# EAGLE board Airowl_Eagle (EAGLE 6.5.0)
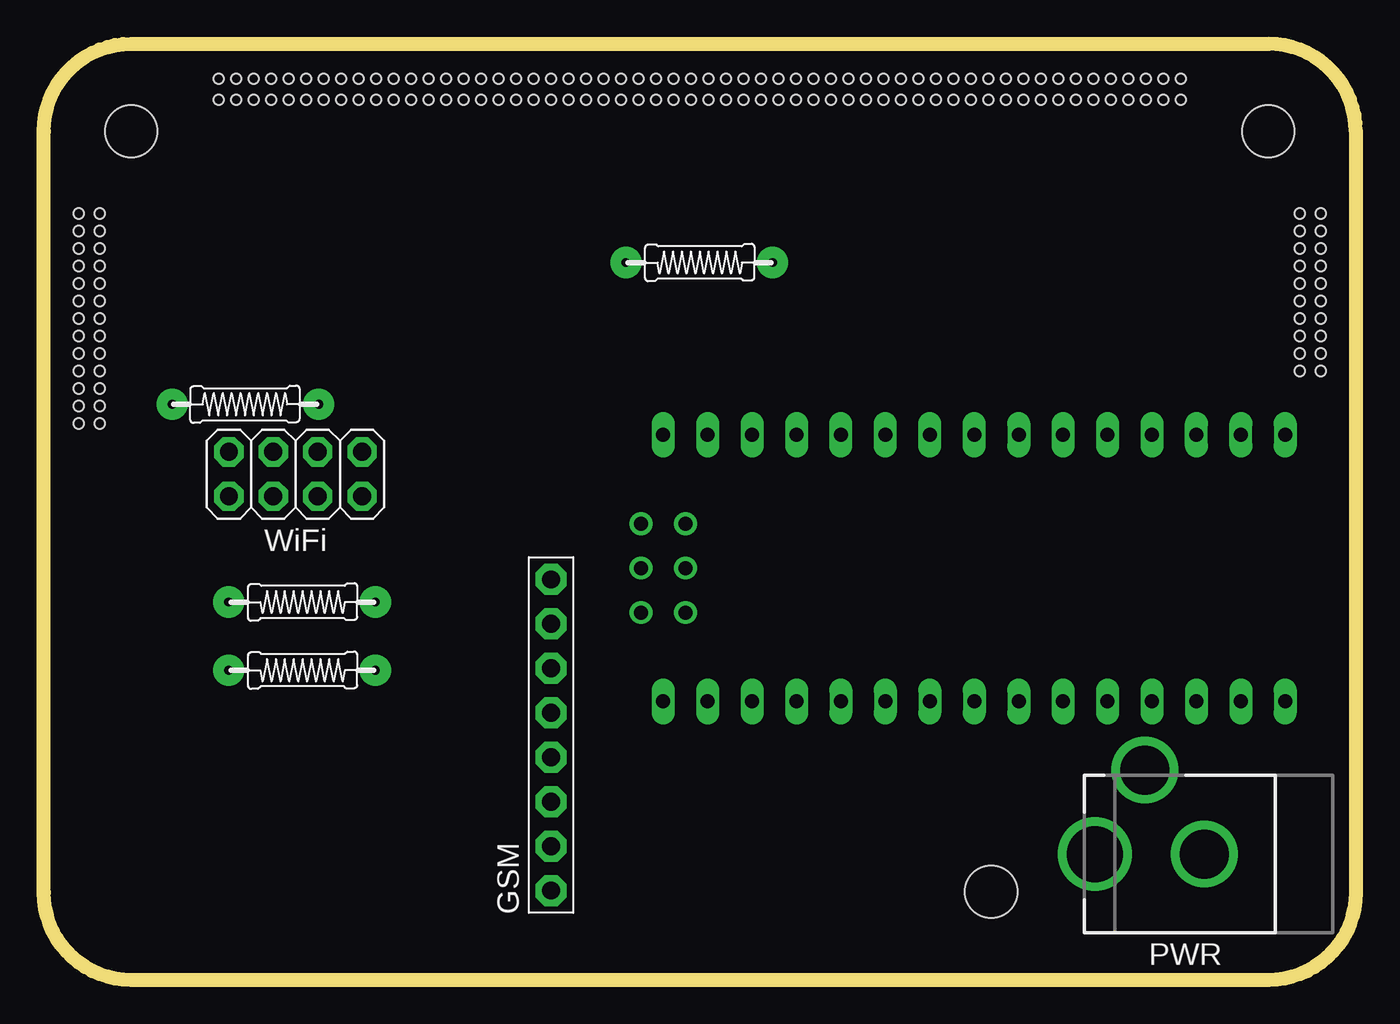
[diagram p0: board, top side]
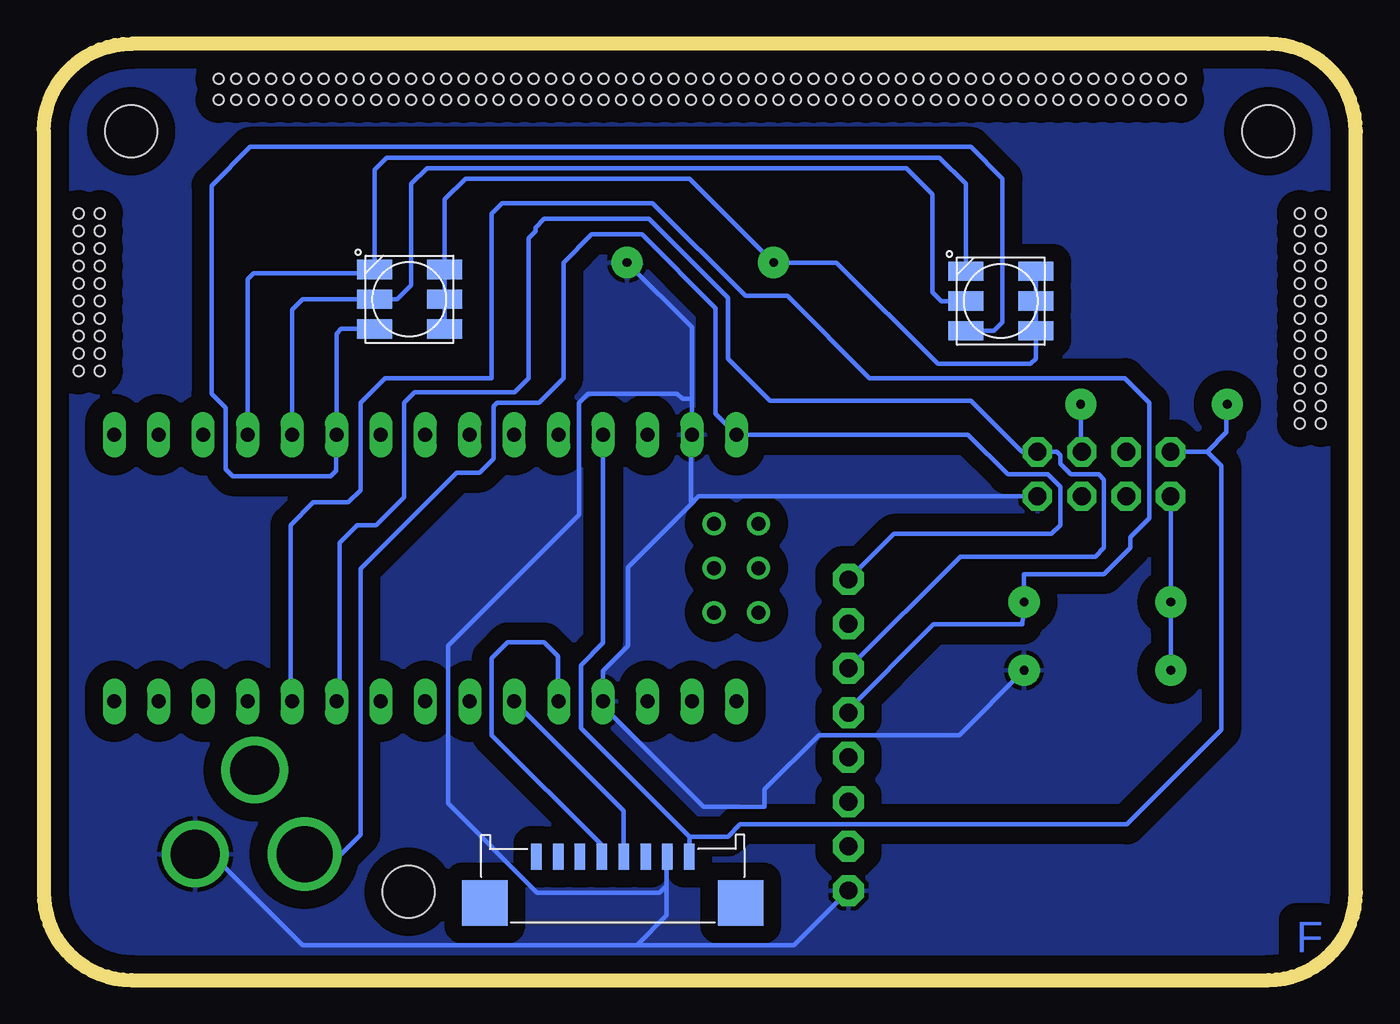
[diagram p1: board, bottom side, seen from below]

Size 75 x 53.5 mm. Coordinates in mm from the lower left corner, seen from the top.
Outline: 0,5 0,48.5 arc-90 5,53.5 70,53.5 arc-90 75,48.5 75,5 arc-90 70,0 5,0 arc-90 0,5
Copper layers (1*16): Top 0.035mm / dielectric 1.5mm / Bottom 0.035mm
Design rules "default": minimum track width 10mil, minimum drill 24mil, track to track 8mil, track to pad 8mil, pad to pad 8mil, via to via 8mil, smd to smd 8mil, copper to edge 40mil, drill to drill 8mil, minimum pad ring 10mil, minimum via ring 8mil, stop-mask expansion 4mil, vias tented up to drill 0mil, thermal gap 10mil
Holes 3 mm at 54.15,5.05 5,48.5 70,48.5
Holes 0.6 mm at 2,43.8 3.2,43.8 2,42.8 3.2,42.8 3.2,41.8 2,41.8 3.2,40.8 2,40.8 3.2,39.8 2,39.8 3.2,38.8 2,38.8 2,37.8 3.2,37.8 3.2,36.8 2,36.8 3.2,35.8 2,35.8 3.2,34.8 2,34.8 2,33.8 3.2,33.8 3.2,32.8 2,32.8 2,31.8 3.2,31.8 10,50.3 10,51.5 11,50.3 11,51.5 12,51.5 12,50.3 13,51.5 13,50.3 14,51.5 14,50.3 15,51.5 15,50.3 16,50.3 16,51.5 17,51.5 17,50.3 18,51.5 18,50.3 19,51.5 19,50.3 20,50.3 20,51.5 21,51.5 21,50.3 22,50.3 22,51.5 23,50.3 23,51.5 24,50.3 24,51.5 25,50.3 25,51.5 26,51.5 26,50.3 27,51.5 27,50.3 28,51.5 28,50.3 29,51.5 29,50.3 30,50.3 30,51.5 31,51.5 31,50.3 32,51.5 32,50.3 33,51.5 33,50.3 34,50.3 34,51.5 35,51.5 35,50.3 36,50.3 36,51.5 37,50.3 37,51.5 38,50.3 38,51.5 39,50.3 39,51.5 40,51.5 40,50.3 41,51.5 41,50.3 42,51.5 42,50.3 43,51.5 43,50.3 44,50.3 44,51.5 45,51.5 45,50.3 46,51.5 46,50.3 47,51.5 47,50.3 48,50.3 48,51.5 49,51.5 49,50.3 50,50.3 50,51.5 51,51.5 51,50.3 52,51.5 52,50.3 53,51.5 53,50.3 54,51.5 54,50.3 55,51.5 55,50.3 56,51.5 56,50.3 57,51.5 57,50.3 58,51.5 58,50.3 59,51.5 59,50.3 60,51.5 60,50.3 61,51.5 61,50.3 62,51.5 62,50.3 63,51.5 63,50.3 64,51.5 64,50.3 65,51.5 65,50.3 71.8,43.8 73,43.8 71.8,42.8 73,42.8 73,41.8 71.8,41.8 73,40.8 71.8,40.8 73,39.8 71.8,39.8 73,38.8 71.8,38.8 71.8,37.8 73,37.8 73,36.8 71.8,36.8 73,35.8 71.8,35.8 73,34.8 71.8,34.8

## Footprints (pad centres in the part's own frame; a part is rotated, then mirrored left to right if it is on the bottom)
NANO = drill 0.8 long: 3.3V -10.16,24.13; 5V -10.16,-1.27; A0 -10.16,19.05; A1 -10.16,16.51; A2 -10.16,13.97; A3 -10.16,11.43; A4 -10.16,8.89; A5 -10.16,6.35; A6 -10.16,3.81; A7 -10.16,1.27; AREF -10.16,21.59; D2 5.08,1.27; D3 5.08,3.81; D4 5.08,6.35; D5 5.08,8.89; D6 5.08,11.43; D7 5.08,13.97; D8 5.08,16.51; D9 5.08,19.05; D10 5.08,21.59; D11 5.08,24.13; D12 5.08,26.67; D13 -10.16,26.67; GND -10.16,-6.35; GND1 5.08,-1.27; RAW -10.16,-8.89; RST -10.16,-3.81; RST1 5.08,-3.81; RX1 5.08,-6.35; TX0 5.08,-8.89 | drill 0.8: ICSP1 -5.08,-10.16; ICSP2 -5.08,-7.62; ICSP3 -2.54,-10.16; ICSP4 -2.54,-7.62; ICSP5 0,-10.16; ICSP6 0,-7.62
WINSEN_CONNECTOR = smd 2.6 x 2.6: P$1 0.2,1.1; P$10 14.85,1.1 | smd 0.6 x 1.5: P$2 3.15,3.75; P$3 4.4,3.75; P$4 5.65,3.75; P$5 6.9,3.75; P$6 8.15,3.75; P$7 9.4,3.75; P$8 10.65,3.75; P$9 11.9,3.75
RGBLED5050 = smd 2 x 1.1: 1 -2,1.7; 2 -2,0; 3 -2,-1.7; 4 2,-1.7; 5 2,0; 6 2,1.7
2X04 = drill 1.016 pad 1.676 octagon: 1 -3.81,-1.27; 2 -3.81,1.27; 3 -1.27,-1.27; 4 -1.27,1.27; 5 1.27,-1.27; 6 1.27,1.27; 7 3.81,-1.27; 8 3.81,1.27
RESISTER(HORIZONTAL) = drill 0.5 pad 1.778: 1 -4.159,0; 2 4.223,0
1X08-BIG = drill 1.016 pad 1.778 octagon: 1 -8.89,0; 2 -6.35,0; 3 -3.81,0; 4 -1.27,0; 5 1.27,0; 6 3.81,0; 7 6.35,0; 8 8.89,0
DCJACK_2MM_PTH = drill 2.8: GND 0,7.35; GNDBREAK 4.8,10.75 | drill 3.2: PWR 0,13.6

## Placement (x,y rotation side)
E$1  [NANO]  44.3,21 270 top
E$2  [WINSEN_CONNECTOR]  50,3.3 0 bottom
E$3  [RGBLED5050]  20.3,38.8 180 bottom
E$4  [2X04]  14.39,28.91 180 top
E$5  [RGBLED5050]  54.1,38.9 180 bottom
E$6  [RESISTER(HORIZONTAL)]  37.5,41 180 top
E$7  [RESISTER(HORIZONTAL)]  11.5,32.9 0 top
E$8  [RESISTER(HORIZONTAL)]  14.8,21.6 180 top
E$9  [RESISTER(HORIZONTAL)]  14.8,17.7 180 top
GSM  [1X08-BIG]  29,14 90 top
PWR  [DCJACK_2MM_PTH]  73.69,7.2 90 top

## Library data of the parts
E$1 = Arduino-clone
E$2 = Wnisen
E$3-E$5 GSM PWR = adafruit
E$6-E$9 = ROBOCON

## Nets
5V: E$1.5V E$2.P$9 E$4.7 E$7.1
GND: E$1.GND E$1.GND1 E$2.P$8 E$4.2 E$6.1 E$9.1 GSM.1 PWR.GND
PWR: E$1.RAW GSM.8 PWR.PWR
S$1: E$3.1 E$3.2 E$3.3 E$5.1 E$5.2 E$5.3 E$6.2
S$3: E$1.A1 E$3.5 E$5.5
S$6: E$1.A0 E$3.4 E$5.4
S$7: E$1.A2 E$3.6 E$5.6
S$8: E$1.D7 E$4.1 GSM.6
S$9: E$1.D8 E$8.1 GSM.5
S$10: E$1.D3 E$2.P$6
S$11: E$1.D2 E$2.P$5
S$12: E$4.3 E$7.2
S$13: E$4.8 E$8.2 E$9.2

## Tracks (layer width: path | path; a pad name or v marks a point on that pad's centre or on a via)
5V
  Bottom 0.254: E$1.5V 43.03,19.27 44.3,18 44.3,14.4 38.1,8.2 | 38.1,8.2 38.1,7.7 38,7.05 E$2.P$9 | 8.5,30.2 8.52,30.18 E$4.7 10.56,30.2 8.5,30.2 | 8.5,30.2 7.4,31.3 7.4,32.84 E$7.1 | 8.5,30.2 7.7,29.4 7.7,14.3 13.1,8.9 35.2,8.9 35.9,8.2 38.1,8.2
GND
  Bottom 0.254: 37.95,33.2 E$1.GND 38,31.11 38,27.2 | 37.95,33.2 37.95,37.29 E$6.1 | 38,27.2 41.6,23.6 41.6,19.1 43.03,17.67 E$1.GND1 43.03,15.63 37.3,9.9 33.79,9.9 33.79,10.91 30.7,14 22.66,14 E$9.1 | E$4.2 37.56,27.64 38,27.2 | 39.4,5.4 39.4,3.7 41.1,2 | 41.1,2 60.2,2 65.4,7.2 PWR.GND | GSM.1 32.11,2 41.1,2 | E$2.P$8 39.4,7 39.4,5.4 | 39.4,5.4 39.8,5 46.8,5 51.9,10.1 51.9,19.1 44.4,26.6 44.4,33 43.9,33.5 38.8,33.5 38.5,33.2 37.95,33.2
  pour Bottom (isolate 1.016): -0.6,-0.6 -0.6,54.1 75.6,54.1 75.6,-0.7 -0.6,-0.7
PWR
  Bottom 0.254: PWR.PWR 58,7.2 56.9,8.3 56.9,23.5 51.4,29 50.1,29 49.3,29.8 49.3,32.8 49.1,33 46.7,33 45.3,34.4 45.3,41 43.7,42.6 40.8,42.6 36.6,38.4 36.6,32.35 E$1.RAW | E$1.RAW 35.41,31.19 35.4,31.2 | E$1.RAW 22.16,31.16 19.9,28.9 17.6,28.9 16.9,28.2 16.9,26 17.4,25.5 26.39,25.5 GSM.8
S$1
  Bottom 0.254: E$3.3 E$3.2 E$3.1 18.3,35.5 18.6,35.2 23.9,35.2 29.7,41 E$6.2 38.08,45.8 50.9,45.8 52.1,44.6 E$5.3 E$5.2 E$5.1
S$3
  Bottom 0.254: E$1.A1 60.81,38.29 60.2,38.9 E$5.5 54.8,38.9 54,39.7 54,45.5 53.1,46.4 25.7,46.4 24.2,44.9 24.2,39.3 23.7,38.8 E$3.5
S$5
  Bottom 0.254: 52.88,39.05 52.9,39.03
S$6
  Bottom 0.254: E$1.A0 63.35,40.05 63,40.4 56.3,40.4 E$5.4 56.1,46.3 55.4,47 23.8,47 22.3,45.5 E$3.4
S$7
  Bottom 0.254: E$5.6 58,37.2 58.27,36.93 E$1.A2 58.3,31.13 58.3,29.1 58.6,28.8 64.2,28.8 64.6,29.2 64.6,32.7 65.4,33.5 65.4,45.4 63.2,47.6 22,47.6 20.2,45.8 20.2,37.6 20.7,37.1 E$3.6
S$8
  Bottom 0.254: GSM.6 22.61,24.2 14.9,24.2 14.4,24.7 14.4,28.6 14.7,28.9 16.3,28.9 16.9,29.5 16.9,30 17.08,30.18 E$4.1 19.08,30.18 22,33.1 33.5,33.1 35.9,35.5 35.9,39 40.4,43.5 46.4,43.5 46.9,43 46.9,42.8 47.3,42.4 47.3,34.4 48.1,33.6 53.8,33.6 54.4,33 54.4,27.6 56,26 57.1,26 58.1,25 58.1,16.09 E$1.D7
S$9
  Bottom 0.254: GSM.5 29.21,15.24 24.13,20.32 19.05,20.32 E$8.1 18.96,23.2 14.4,23.2 12.9,24.7 12.9,25.3 11.8,26.4 11.8,33 13.2,34.4 27.8,34.4 32.5,39.1 34.9,39.1 40.2,44.4 48.8,44.4 49.4,43.8 49.4,34.4 55.5,34.4 56.9,33 56.9,28 57.6,27.3 59.6,27.3 60.9,26 60.9,16.01 E$1.D8
S$10
  Bottom 0.254: E$2.P$6 41.85,9.66 E$1.D3
S$11
  Bottom 0.254: E$2.P$5 43.1,7.7 49.4,14 49.4,18.4 48.5,19.3 46.4,19.3 45.6,18.5 45.6,15.95 E$1.D2
S$12
  Bottom 0.254: E$7.2 15.72,30.24 E$4.3
S$13
  Bottom 0.254: 10.52,27.7 E$4.8 10.58,20 E$8.2 E$9.2

## Text on the board
Bottom: F
tNames: WiFi
tValues: 10k | 1k | 2k